# Altium PCB LimeSDR-Mini_2v5_Rounded.PcbDoc (part 7 of 7)
Units mm, origin at the board's own origin, x right, y up, seen from the top; angles counter-clockwise.
Board outline 69 x 31.37 mm, 8 copper layers (Top, L2, L3, L4, L5, L6, L7, Bottom), stack 1.555 mm thick; 439 components, 294 nets, 1986 pads, 831 vias.
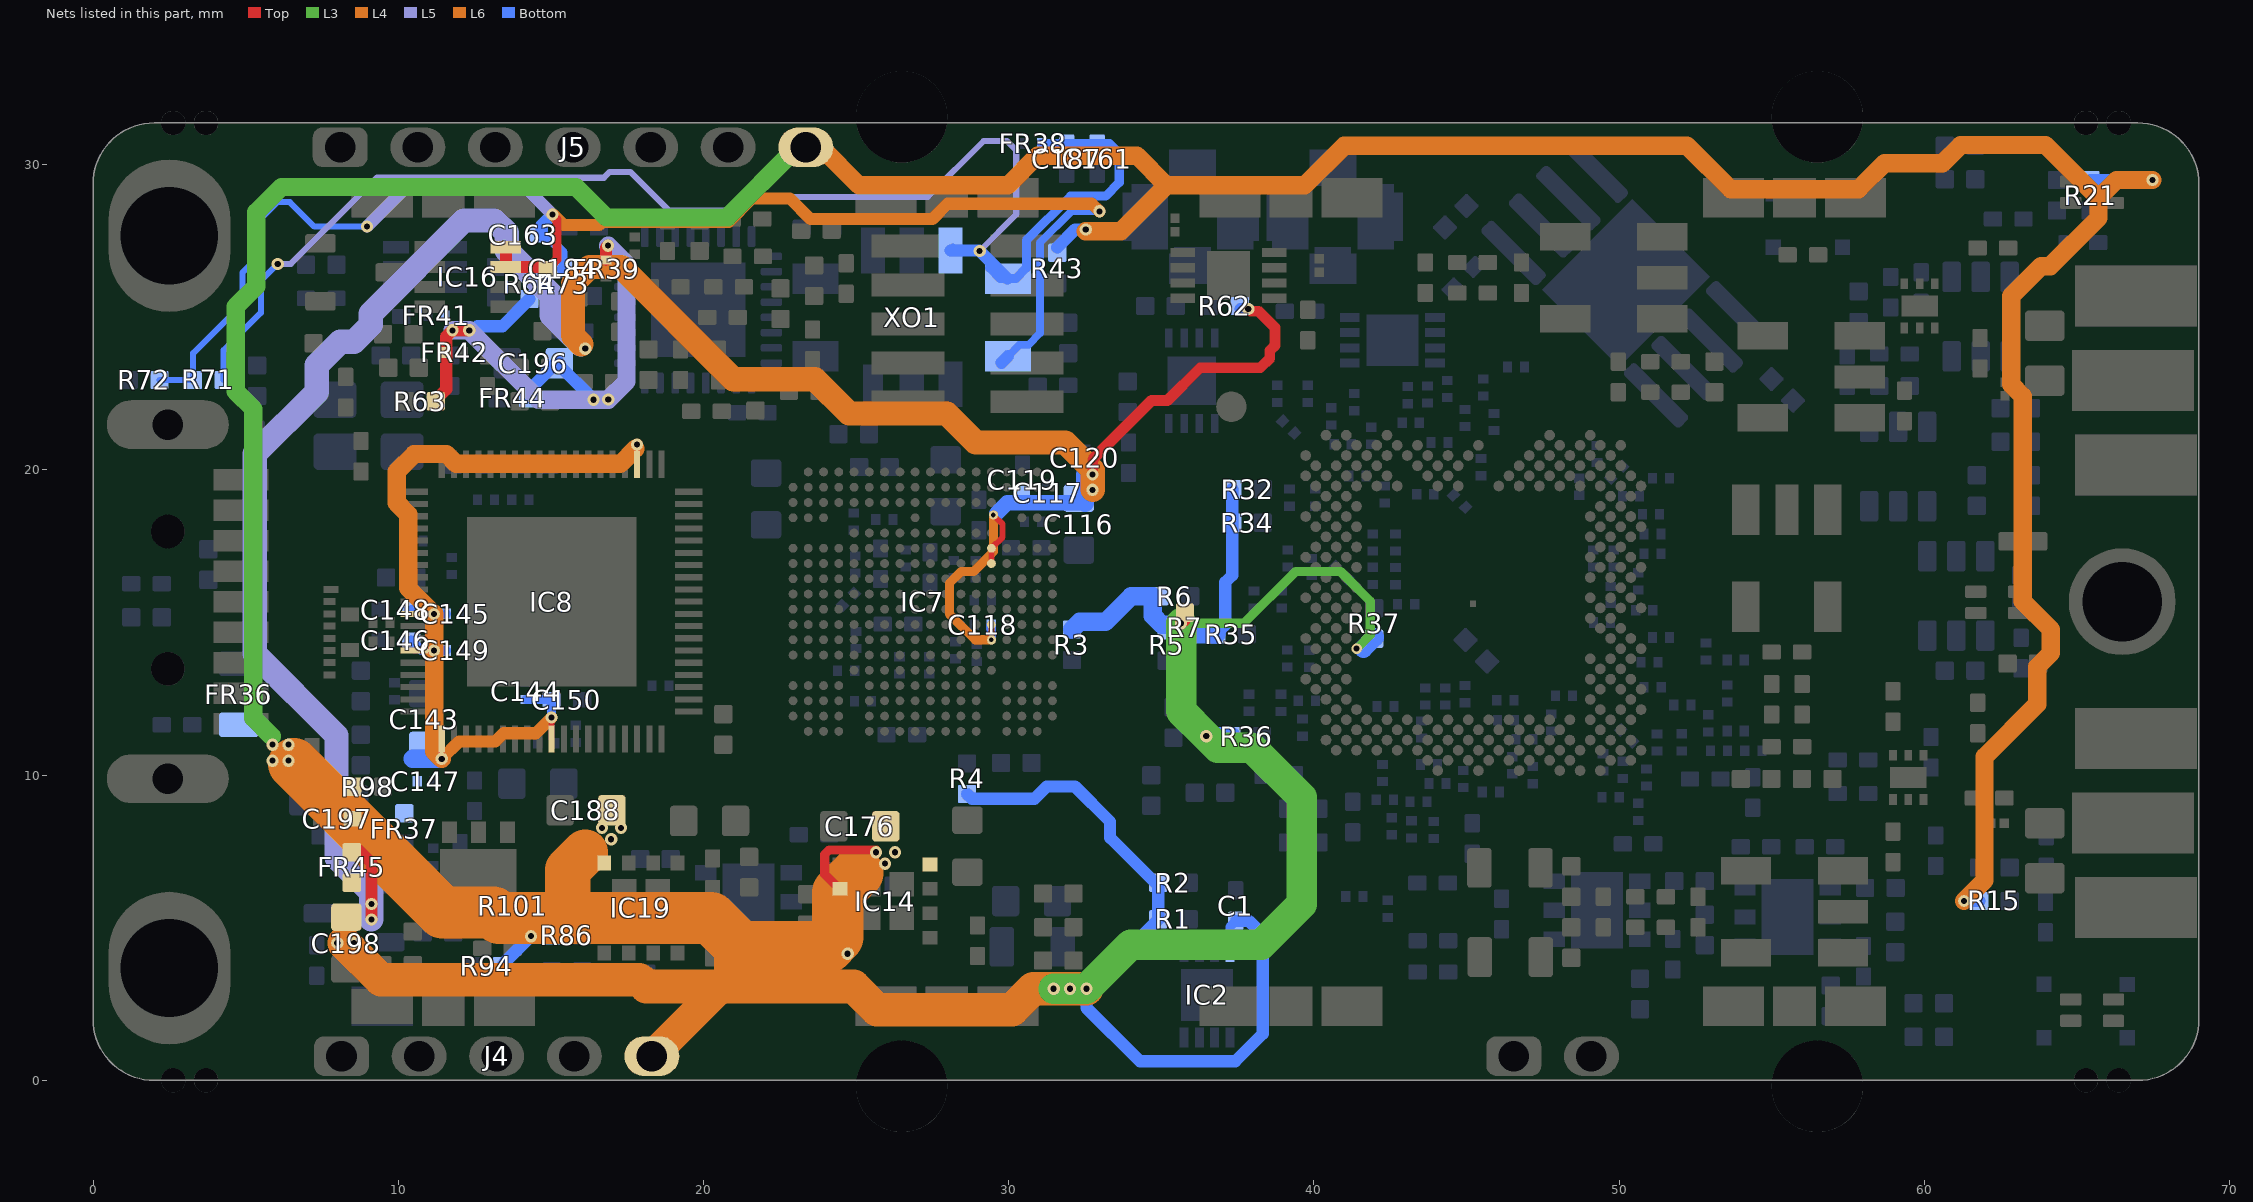
[diagram p12: the nets of this part, all layers, seen from the top]

## Via types
v1: diameter 0.4, hole 0.2, Top to Bottom, tented both sides, 554 vias
v2: diameter 0.3, hole 0.15, Top to Bottom, tented both sides, 160 vias
v3: diameter 0.35, hole 0.2, Top to Bottom, tented both sides, 88 vias
v4: diameter 0.5, hole 0.2, Top to Bottom, tented bottom, 25 vias
v5: diameter 0.5, hole 0.2, Top to Bottom, tented both sides, 4 vias

## Nets (pads, with @x,y where several pads share a name; then routed paths per layer and width w, separated by ;. In a path a pad name is that pad's centre, name@x,y a point inside that pad or via, vN(x,y) a via of type N, cw(c..) or ccw(c..) an arc to the next point about the centre after c; other vN are vias at no path point) (continued)
VCC3P3_CLK: C196.2 FR39.1 FR41.1 FR42.1 FR44.2 R63.2 R64.2 | length 20.9
  Top w0.4: R63.2@11.225,22.3 11.57,22.645 FR42.1@11.57,23.85 11.57,24.37 v1(11.775,24.575) v1(12.325,24.575) ; FR39.1@16.808,26.877 16.808,27.283 v1(16.875,27.35)
  L5 w0.6: v1(11.775,24.575) v1(12.325,24.575) 14.595,22.305 v1(16.88,22.305) 17.475,22.9 17.475,26.75 v1(16.875,27.35)
  Bottom w0.4: 12.6,24.713 13.412,24.713 R64.2@14.3,25.6 ; FR44.2@14.25,22.4 cw(c14.672,22.4) 14.374,22.699 C196.2@15.225,23.55 ; C196.2@15.2,23.5 16.395,22.305 v1(16.88,22.305)
  other v1: 16.4,22.3
VCC3P3_XO: C161.2 C187.2 FR38.2 R71.2 XO1.8 XO1.9 | length 47.6
  L5 w0.2: v1(6.05,26.75) 6.475,26.75 9.3,29.575 16.734,29.575 16.919,29.76 17.615,29.76 18.875,28.5 21,28.5 21.45,28.95 27.35,28.95 29.175,30.775 29.95,30.775 30.25,30.475 30.25,28.375 v1(29.05,27.175)
  Bottom w0.2: R71.2@4.275,22.95 4.275,23.925 5.5,25.15 5.5,26.2 v1(6.05,26.75)
  Bottom w0.3: XO1.8@28.095,27.19 XO1.8@28.168,27.263 ; XO1.9@29.38,26.62 29.73,26.27 29.955,26.27 XO1.9@29.98,26.27 30.23,26.27 30.58,26.62 30.58,27.526 32.029,28.975 33.175,28.975 33.625,29.425 33.625,30.375 33.3,30.7 C161.2@32.9,30.7 C187.2@31.9,30.7 FR38.2@31.08,30.7
  Bottom w0.4: XO1.8@28.095,27.19 29.035,27.19 v1(29.05,27.175) XO1.9@29.955,26.27
VCC5P0: C176.2 C188.2 FR36.2 IC14.2 IC14.8 IC19.8 J4.5 J5.7 R15.1 R21.1 R43.1 R86.2 R94.1 | length 153.9
  Top w0.3: IC14.2@24.475,6.275 24.446,6.275 23.975,6.746 23.975,7.404 24.121,7.55 v1@25.65,7.55
  L3 w0.6: 5.85,11.275 5.25,11.875 5.25,22 4.675,22.575 4.675,25.35 5.35,26.025 5.35,28.45 6.175,29.275 15.825,29.275 16.825,28.275 20.775,28.275 22.975,30.475 J5.7@23.354,30.475
  L4 w0.6: J5.7@23.354,30.575 23.85,30.575 25.1,29.325 29.975,29.325 30.95,30.3 34.2,30.3 35.175,29.325 ; v1@32.525,27.825 33.675,27.825 35.175,29.325 ; v1(61.3,5.878) 61.975,6.553 61.975,10.6 63.7,12.325 63.7,13.55 64.15,14 64.15,14.775 63.225,15.7 63.225,22.425 62.85,22.8 62.85,25.7 63.825,26.675 64.125,26.675 65.713,28.263 65.713,28.913 ; v1(67.475,29.5) 66.3,29.5 65.713,28.913 ; 35.175,29.325 39.7,29.325 41,30.625 52.225,30.625 53.65,29.2 57.85,29.2 58.7,30.05 60.6,30.05 61.2,30.65 63.975,30.65 65.713,28.913
  L4 w1: J4.5@18.311,0.795 20.85,3.334 20.85,4.025 21.2,4.375
  L4 w1.5: 15.55,5.375 15.55,6.9 16.125,7.475
  L4 w1.7: 6.575,10.375 11.45,5.5 13.125,5.5 13.3,5.325 20.25,5.325 21.2,4.375 24.075,4.375 24.4,4.7 24.4,6.15 25.05,6.8
  Bottom w0.4: R94.1@13.4,3.75 13.5,3.85 13.5,3.875 14.375,4.75 R86.2@15.025,4.75 ; R43.1@31.594,27.291 32.178,27.875 v1(32.525,27.875) ; v1(61.3,5.878) R15.1@61.8,5.878 ; R21.1@65.45,29.5 v1(67.475,29.5)
  other v1: 24.725,4.15 14.35,4.725 25.95,7.1 25.65,7.475 26.275,7.475 16.975,7.9 16.675,8.275 17.3,8.275 5.875,10.475 6.4,10.475 5.875,11 6.4,11
VD10_FT: C143.2 C144.2 C145.1 C146.1 C147.1 C148.1 C149.1 C150.1 FR37.1 IC8.3 IC8.30 IC8.33 IC8.39 IC8.48 | length 30.7
  Top w0.2: IC8.33@10.525,14.085 v1(11.175,14.085) ; IC8.30@10.525,15.285 v1(11.175,15.285) ; v1(11.425,10.535) IC8.39@11.425,11.185 ; IC8.48@15.025,11.185 v1@15.025,11.835 ; IC8.3@17.825,20.185 v1(17.825,20.835)
  L4 w0.6: v1(11.425,10.535) 11.175,10.785 v1(11.175,14.085) v1(11.175,15.285) 10.325,16.135 10.325,18.55 9.95,18.925 9.95,19.95 10.525,20.525 11.575,20.525 11.9,20.2 17.275,20.2 v1@17.775,20.7
  L6 w0.4: v1(11.425,10.535) 11.99,11.1 13.175,11.1 13.45,11.375 14.515,11.375 v1(15.025,11.885)
  Bottom w0.3: C146.1@10.425,14.425 10.765,14.085 v1(11.175,14.085) C149.1@11.585,14.085 ; C148.1@10.425,15.425 11.035,15.425 v1(11.175,15.285) C145.1@11.585,15.285 ; C144.2@14.18,12.475 C150.1@15.025,12.475 v1(15.025,11.885)
  Bottom w0.6: C143.2@10.475,10.535 v1@11.35,10.535
VDIO_LMS: C1.1 C198.2 FR45.2 IC2.8 R1.1 R2.1 R3.2 R4.2 R5.1 R6.1 R7.2 R32.1 R34.1 R35.1 R36.1 R37.1 | length 94.7
  Top w0.4: v1(35.65,14.978) 35.775,15.103 R7.2@35.775,15.325 R7.2@35.775,15.375
  L3 w0.3: v1(35.65,14.978) 37.709,14.978 39.406,16.675 40.875,16.675 41.85,15.7 41.85,14.595 v3(41.401,14.146)
  L3 w1: v1(31.475,3) v1(32.013,3) v1(32.55,3) 34,4.45 38.275,4.45 39.6,5.775 39.6,9.275 37.972,10.903 36.85,10.903 v1(36.475,11.278) 35.65,12.103 v1(35.65,14.978)
  L6 w1.1: 8.225,4.5 9.425,3.3 17.9,3.3 18.125,3.075 24.925,3.075 25.685,2.315 30.115,2.315 30.8,3 v1(31.475,3) v1(32.013,3) v1(32.55,3)
  Bottom w0.3: IC2.8@37.25,4.2 37.25,5.025 C1.1@37.45,5.225
  Bottom w0.4: R4.2@28.635,9.385 28.795,9.225 30.85,9.225 31.25,9.625 32.175,9.625 33.325,8.475 33.325,7.95 34.9,6.375 R1.1@34.9,5.275 32.625,3 v1(32.55,3) 32.55,2.375 34.3,0.625 37.425,0.625 38.325,1.525 38.325,4.775 37.875,5.225 C1.1@37.45,5.225 ; R35.1@36.801,14.621 37.097,14.917 37.097,16.322 37.326,16.551 R32.1@37.326,19.371
  Bottom w0.6: v1(31.475,3) v1(32.013,3) v1(32.55,3) ; R3.2@32.075,14.775 32.325,15.025 33.175,15.025 34.01,15.86 34.721,15.86 34.721,15.229 35.025,14.925 35.65,14.925 35.703,14.925 36.006,14.621 R35.1@36.801,14.621 ; v1(36.475,11.278) R36.1@37.3,11.278 ; 41.627,14.147 R37.1@42.001,14.521
  other v1: 8,4.5 8.55,4.5
VDIO_LMS_FPGA: C116.2 C117.2 C118.1 C119.2 C120.1 C197.2 FR45.1 IC7.G5 IC7.H5 IC7.M5 IC7.N5 R62.2 R98.2 R101.2 | length 81.7
  Top w0.2: v2(29.435,14.435) IC7.H5@29.435,14.935 ; IC7.M5@29.435,16.935 IC7.N5@29.435,17.435 29.8,17.8 29.8,18.225 v2(29.5,18.525)
  Top w0.35: v1(32.75,19.85) 32.75,20.345 34.68,22.275 35.205,22.275 36.28,23.35 38.247,23.35 38.55,23.653 38.55,23.903 38.725,24.078 38.725,24.661 38.186,25.2 37.939,25.2 37.864,25.275 v1(37.85,25.275)
  Top w0.4: FR45.1@8.725,7.525 9.118,7.132 v1(9.118,5.782) v1(9.118,5.275)
  L4 w0.3: v2(29.435,14.435) 28.903,14.435 28.059,15.279 28.059,16.284 28.45,16.675 28.85,16.675 29.5,17.325 v2(29.5,18.525)
  L4 w0.8: v1@16,24.125 15.725,24.4 15.725,26.1 16.275,26.65 17.3,26.65 20.975,22.975 23.65,22.975 24.775,21.85 27.975,21.85 28.925,20.9 31.85,20.9 32.75,20 v1(32.75,19.35)
  L5 w0.8: v1(9.118,5.275) v1(9.118,5.782) 9.118,6.157 7.975,7.3 7.975,11.3 5.3,13.975 5.3,20.525 7.325,22.55 7.325,23.425 8.1,24.2 8.55,24.2 9.1,24.75 9.1,25.125 12.15,28.175 13.15,28.175 13.55,27.775 13.55,27.2 15.025,25.725 15.025,25.075 15.975,24.125
  Bottom w0.3: C118.1@29.43,14.925 29.43,14.44 v2(29.435,14.435)
  Bottom w0.4: R62.2@37.6,25.275 v1(37.85,25.275)
  Bottom w0.5: v2@29.6,18.575 29.95,18.925 C116.2@32.5,18.925
  Bottom w0.6: C116.2@32.5,18.925 32.5,19.85
  other v1: 16.125,23.975
XO_VC: C163.2 C184.1 IC16.3 IC16.4 R71.1 R72.1 R73.1 XO1.10 | length 50.7
  Top w0.3: C184.1@14.9,26.6 14.95,26.6 15.05,26.7 15.05,26.75 15.2,26.9 15.2,28.198 15.05,28.348 v1(15.05,28.375)
  Top w0.4: IC16.4@13.525,27.3 IC16.3@13.525,26.65 14.85,26.65 C184.1@14.9,26.6
  L4 w0.4: v1(15.05,28.375) 15.068,28.375 15.418,28.025 16.575,28.025 16.675,28.125 20.825,28.125 21.6,28.9 22.825,28.9 23.5,28.225 27.5,28.225 28,28.725 32.725,28.725 v1(32.975,28.475)
  L5 w0.4: v1(8.975,27.975) 10.175,29.175 14.25,29.175 v1(15.05,28.375)
  Bottom w0.2: R72.1@2.175,22.95 R71.1@3.275,22.95 3.275,23.825 4.9,25.45 4.9,26.475 5.35,26.925 5.35,28.091 6.034,28.775 6.45,28.775 7.25,27.975 v1(8.975,27.975)
  Bottom w0.25: XO1.10@29.98,23.73 30.355,24.105 30.655,24.105 31.025,24.475 31.025,27.441 32.059,28.475 v1(32.975,28.475)
  Bottom w0.3: C163.2@14.65,27.7 14.75,27.6 14.936,27.6 15.4,27.136 R73.1@15.4,26.6
  Bottom w0.4: C163.2@14.65,27.7 14.7,27.75 14.7,28.025 v1(15.05,28.375) ; R73.1@15.4,26.575 R73.1@15.4,26.6 ; XO1.10@29.763,23.512 XO1.10@29.98,23.73
pads on no net: C1.0 C2.0 C3.0 C4.0 C5.0 C6.0 C7.0 C8.0 C9.0 C10.0 C11.0 C12.0 C13.0 C14.0 C15.0 C16.0 C17.0 C18.0 C19.0 C20.0 C21.0 C22.0 C23.0 C24.0 C25.0 C26.0 C27.0 C28.0 C29.0 C68.0 C69.0 C70.0 C71.0 C82.0 C83.0 C84.0 C97.0 C99.0 C102.0 C104.0 C109.0 C113.0 C115.0 C116.0 C119.0 C121.0 C124.0 C129.0 C130.0 C131.0 C132.0 C133.0 C134.0 C143.0 C146.0 C148.0 C150.0 C151.0 C153.0 C154.0 C155.0 C156.0 C157.0 C158.0 C159.0 C160.0 C161.0 C162.0 C163.0 C164.0 C165.0 C166.0 C167.0 C168.0 C169.0 C170.0 C171.0 C172.0 C173.0 C174.0 C175.0 C176.0 C177.0 C178.0 C179.0 C180.0 C181.0 C182.0 C183.0 C184.0 C185.0 C186.0 C187.0 C188.0 C189.0 C190.0 C191.0 C192.0 C193.0 C194.0 C195.0 C196.0 C197.0 C198.0 C199.0 C200.0 C201.0 ESD3.9 ESD3.10 FL1.1 FR22.0 FR23.0 FR25.0 FR35.0 FR36.0 FR37.0 FR44.0 FR45.0 IC1.A5 IC1.A13 IC1.A21 IC1.AA1 IC1.AA3 IC1.AA5 IC1.AB2 IC1.AB4 IC1.AB6 IC1.AC3 IC1.AC5 IC1.AD2 IC1.AE1 IC1.AE5 IC1.AG3 IC1.AG33 IC1.AH2 IC1.AH4 IC1.AH32 IC1.AJ1 IC1.AJ3 IC1.AJ5 IC1.AJ11 IC1.AJ13 IC1.AJ21 IC1.AJ27 IC1.AJ29 IC1.AJ31 IC1.AJ33 IC1.AK2 IC1.AK4 IC1.AK6 IC1.AK8 IC1.AK10 IC1.AK26 IC1.AK28 IC1.AK30 IC1.AK32 IC1.AK34 IC1.AL3 IC1.AL5 IC1.AL7 IC1.AL9 IC1.AL11 IC1.AL27 IC1.AL29 IC1.AL31 IC1.AL33 IC1.AM6 IC1.AM10 IC1.AM12 IC1.AM28 IC1.AM30 IC1.AM34 IC1.AN11 IC1.AN27 IC1.AN29 IC1.AN31 IC1.AP30 IC1.AP32 IC1.B2 IC1.B4 IC1.B12 IC1.B14 IC1.B22 IC1.C1 IC1.C3 IC1.C5 IC1.C9 IC1.C11 IC1.C13 IC1.C15 IC1.C17 IC1.C19 IC1.C31 IC1.D2 IC1.D4 IC1.D8 IC1.D10 IC1.D12 IC1.D14 IC1.D18 IC1.D22 IC1.D30 IC1.D32 IC1.E3 IC1.E9 IC1.E11 IC1.E13 IC1.E15 IC1.E23 IC1.E29 IC1.E31 IC1.F2 IC1.F4 IC1.F10 IC1.F12 IC1.F14 IC1.F16 IC1.F22 IC1.F26 IC1.F32 IC1.G1 IC1.G29 IC1.J1 IC1.M2 IC1.M6 IC1.P2 IC1.R3 IC1.R5 IC1.T4 IC1.T6 IC1.U1 IC1.U3 IC1.U5 IC1.V2 IC1.V4 IC1.V6 IC1.W3 IC1.Y2 IC1.Y4 IC1.Y6 IC7.J3 IC7.U15 IC7.V2 IC7.V3 IC7.V11 IC7.V12 IC8.17 IC8.18 IC8.19 IC9.5 IC9.7 IC9.8 IC9.11 IC9.12 IC9.20 IC9.22 IC9.24 IC10.9 IC14.1 IC14.7 IC17.0 IC19.1 IC19.7 IC20.1 IC20.2 IC20.3 IC20.7 IC20.PAD J6.11 LED1.0 LED2.0 LED3.0 MN1.0 MN2.0 MN3.0 MN4.0 MN5.0 MN6.0 MN7.0 MN8.0 MN9.0 MN10.0 MN11.0 MN12.0 MN13.0 MN14.0 MN15.0 MN16.0 MN17.0 MN18.0 MN19.0 MN20.0 MN21.0 MN22.0 MN23.0 MN24.0 R1.0 R2.0 R3.0 R4.0 R5.0 R6.0 R7.0 R8.0 R9.0 R10.0 R11.0 R12.0 R13.0 R14.0 R15.0 R16.0 R17.0 R18.0 R19.0 R20.0 R21.0 R22.0 R23.0 R24.0 R25.0 R26.0 R27.0 R31.0 R32.0 R33.0 R34.0 R35.0 R36.0 R37.0 R38.0 R39.0 R42.0 R43.0 R44.0 R45.0 R46.0 R47.0 R48.0 R49.0 R50.0 R51.0 R52.0 R53.0 R54.0 R55.0 R56.0 R57.0 R58.0 R59.0 R60.0 R61.0 R62.0 R63.0 R64.0 R65.0 R66.0 R67.0 R68.0 R69.0 R70.0 R71.0 R72.0 R73.0 R74.0 R75.0 R76.0 R77.0 R78.0 R79.0 R80.0 R81.0 R82.0 R83.0 R84.0 R85.0 R86.0 R87.0 R88.0 R89.0 R90.0 R91.0 R92.0 R93.0 R94.0 R95.0 R96.0 R97.0 R98.0 R99.0 R100.0 R101.0 R102.0 R103.0 SB1.0 SB2.0 SB3.0 SB4.0 T1.2 T2.2 T3.2 T4.2 VT1.0 VT2.0 VT3.0 VT4.0 XO1.1 XO1.2 XO1.3 XO1.7 XT1.0
copper on no net:
  other v2: 30.31,15.56

## Polygon pours and split planes (outlines as drawn)
GND on L2 "GND_L02_P005" (solid, remove dead copper, pour order 5): 0,2 0,29.37 cw(c2,29.37) 2,31.37 67,31.37 cw(c67,29.37) 69,29.37 69,2 cw(c67,2) 67,0 2,0 cw(c2,2)
GND on L7 "GND_L07_P022" (solid, remove dead copper, pour order 22): 0,2 0,29.37 cw(c2,29.37) 2,31.37 67,31.37 cw(c67,29.37) 69,29.37 69,2 cw(c67,2) 67,0 2,0 cw(c2,2)
GND on L5 "GND_L05_P020" (solid, remove dead copper, pour order 20): 0,2 0,29.37 cw(c2,29.37) 2,31.37 67,31.37 cw(c67,29.37) 69,29.37 69,2 cw(c67,2) 67,0 2,0 cw(c2,2)
GND on L6 "GND_L06_P021" (solid, remove dead copper, pour order 21): 0,2 0,29.37 cw(c2,29.37) 2,31.37 67,31.37 cw(c67,29.37) 69,29.37 69,2 cw(c67,2) 67,0 2,0 cw(c2,2)
GND on Top "GND_L01_P004" (solid, remove dead copper, pour order 4): 0,2 0,29.37 cw(c2,29.37) 2,31.37 67,31.37 cw(c67,29.37) 69,29.37 69,2 cw(c67,2) 67,0 2,0 cw(c2,2)
GND on L4 "GND_L04_P019" (solid, remove dead copper, pour order 19): 0,2 0,29.37 cw(c2,29.37) 2,31.37 67,31.37 cw(c67,29.37) 69,29.37 69,2 cw(c67,2) 67,0 2,0 cw(c2,2)
GND on L3 "GND_L03_P018" (solid, remove dead copper, pour order 18): 0,2 0,29.37 cw(c2,29.37) 2,31.37 67,31.37 cw(c67,29.37) 69,29.37 69,2 cw(c67,2) 67,0 2,0 cw(c2,2)
GND on Bottom "GND_L08_P023" (solid, remove dead copper, pour order 23): 0,2 0,29.37 cw(c2,29.37) 2,31.37 67,31.37 cw(c67,29.37) 69,29.37 69,2 cw(c67,2) 67,0 2,0 cw(c2,2)

## Other copper
Top:
  region net VCC1P8: 27.225,5.15 27.725,5.15 27.8,5.225 27.8,7 28.275,7.475 29.05,7.475 29.15,7.375 29.15,6.2 29.075,6.125 29.075,4.875 28.575,4.375 27.25,4.375 27.1,4.525 27.1,5.025
  region net VCC5P0: 25.325,8.65 25.325,7.425 25.825,6.925 26.95,6.925 27.075,6.8 27.625,6.8 27.675,6.85 27.675,8.175 27.025,8.825 25.5,8.825
  region net VCC5P0: 16.5,6.85 16.05,7.3 16.05,8.975 16.425,9.35 17.425,9.35 17.575,9.2 17.575,7.825 17.175,7.425 17.175,7.025 17,6.85
  region net VCC3P3: 19.275,6.875 19.8,7.4 19.8,8.925 19.7,9.025 18.275,9.025 18,8.75 18,8.05 18.375,7.675 18.675,7.675 18.8,7.55 18.8,7 18.925,6.875
  region net GND: 64.7,6.675 64.7,3.675 68.025,3.675 68.95,4.6 68.95,6.675
  region net VDIO_LMS_FPGA: 8.8,9.975 8.25,9.975 8,9.725 8,8.225 8.175,8.05 8.175,7.475 8.475,7.175 8.825,7.175 9.1,7.45 9.1,8.125 8.925,8.3 8.925,9.85
  region net VCC2P5: 10.5,6.925 10.5,9.325 9.85,9.975 9.2,9.975 9.2,9.275 9.2,8.5 9.6,8.1 9.6,6.925
  region net VCC3P3: 13.325,8.5 14.375,8.5 14.675,8.2 14.675,7.617 14.375,7.317 13.967,7.725 13.35,7.725 13.325,7.75
  region net VCC2P5: 9.6,7.275 9.6,6.1 10.325,5.375 10.75,5.375 11.175,4.95 11.925,4.95 12,5.025 12,5.6 11.9,5.7 11.375,5.7 10.5,6.575 10.5,7.275
  region net GND: 3.4,19.05 5.75,19.05 5.75,18.325 3.4,18.325
  region net NetJ6_7: 4.85,15.345 4.025,15.345 3.875,15.195 3.625,15.195 3.525,15.295 3.525,15.685 4.85,15.685
  region net NetJ6_7: 4.85,16.025 4.025,16.025 3.875,16.175 3.625,16.175 3.525,16.075 3.525,15.685 4.85,15.685
  region net USB_VBUS: 3,12.375 3,12.995 4.28,12.995 4.3,12.975 4.3,12.4 4.275,12.375
  region net USB_VBUS: 5.75,13.045 3.975,13.045 3.8,13.22 3.225,13.22 3,12.995 3,12.695 5.75,12.695
  region net USB_VBUS: 5.75,12.325 3.975,12.325 3.8,12.15 3.225,12.15 3,12.375 3,12.675 5.75,12.675
  region net NetC6_2: 63.3,6.325 63.3,5.975 63.475,5.8 64.425,5.8 64.6,5.975 64.6,6.325
  region net GND: 54.825,19.808 55.142,20.125 58.283,20.125 61.491,16.916 61.825,17.25 58.475,20.6 54.525,20.6 54.155,20.23 54.155,19.7 54.825,19.03
  region net GND: 48.675,14.147 49.65,14.147 48.7,15.1 48.675,15.1
  region net GND: 58.725,25.575 56.69,25.575 56.69,23.733 58.725,23.733
  region net GND: 56.14,3.4 55.77,3.03 58.75,3.03 58.75,4.632 58.54,4.842 56.35,4.842 56.14,4.632
  region net GND: 53.005,19.9 53.005,17.5 54.817,17.5 54.817,19.9
  region net GND: 62.275,22.125 62.025,22.125 61.9,22 61.9,21.775 61.975,21.7 62.475,21.7 62.85,22.075 62.85,22.575 62.5,22.575 62.5,22.35
  region net VCC1P8_LMS: 57.31,10.225 57.135,10.4 56.866,10.4 56.693,10.227 56.693,9.877 57.308,9.877
  region net VCC1P8_LMS: 57.31,9.529 57.131,9.35 56.87,9.35 56.693,9.527 56.693,9.877 57.308,9.877
  region net VCC1P8_LMS: 53.675,9.529 53.854,9.35 54.116,9.35 54.293,9.527 54.293,9.877 53.677,9.877
  region net VCC1P8_LMS: 53.675,10.225 53.85,10.4 54.12,10.4 54.293,10.227 54.293,9.877 53.677,9.877
  region net TX1_1_A_P: 48.48,9.907 48.427,9.96 48.427,10.102
  region net VCC1P8_LMS: 45.825,7.625 44.8,7.625 44.625,7.45 44.625,6.5 44.825,6.3 45.825,6.3
  region net VCC1P8_LMS: 45.825,3.408 44.8,3.408 44.625,3.583 44.625,4.533 44.825,4.733 45.825,4.733
  pour cut-out: 5.075,11.225 9.075,11.225 10.325,12.475 10.325,18.7 8.15,18.7 6.58,17.13 5.855,17.13 5.075,16.35
  region net VDIO_LMS: 7.8,5.075 7.8,4.4 7.925,4.275 8.675,4.275 8.8,4.4 8.8,5.075
  region net GND: 49.675,28.825 50.125,28.375 50.125,27.6 50.525,27.2 52.25,27.2 53.425,28.375 53.425,28.825
  region net VCC3P3: 14.575,7.775 14.575,5.65 13.9,4.975 13.325,4.975 13.325,5.675 13.9,5.675 14.125,5.9 14.125,7.775
  region net GND: 13.025,8.475 13.175,8.325 13.175,7.575 13.925,7.575 13.925,5.875 11.375,5.875 11.375,7.575 12.15,7.575 12.15,8.475
  region net VDIO_LMS: 8.8,6.775 8.1,6.775 7.8,6.475 7.8,5.6 8.8,5.6
  region net NetC21_2: 63.3,25.025 63.3,25.25 64.125,26.075 64.4,26.075 64.6,25.875 64.6,25.025
  region net GND: 64.7,10.2 64.7,12.875 68.35,12.875 68.95,12.275 68.95,10.2
  region net GND: 64.7,24.7 64.7,27.7 68.025,27.7 68.95,26.775 68.95,24.7
  region net GND: 64.7,21.175 64.7,18.225 68.321,18.225 68.95,18.854 68.95,21.175
  pour cut-out: 43.775,3.075 42.481,4.369 42.481,8.156 43.5,9.175 44.1,9.175 44.775,9.85 45.48,9.85 46.63,11 48.54,11 49.515,10.025 52.55,10.025 53.55,11.025 53.55,13.3 52.85,14 52.85,16.725 53.3,17.175 54.6,17.175 54.825,17.4 54.825,19.9 54.325,20.4 53,20.4 52.1,21.3 49.216,21.3 49.056,21.14 49.056,19.808 48.348,19.1 45.45,19.1 45.45,20.4 43.325,22.525 41.4,22.525 40.6,23.325 40.6,26.625 41.806,27.831 42.481,27.831 43.325,28.675 58.375,28.675 58.775,28.275 62.862,28.275 64.937,26.2 69,26.2 69,20.6 64.75,20.6 60.9,16.75 60.9,14.525 64.75,10.675 69,10.675 69,8.725 69,5.15 65.05,5.15 62.975,3.075
L2:
  pour cut-out: 49.35,28.325 47.395,28.325 47.395,26.975 49.35,26.975
  pour cut-out: 63.3,7.625 63.3,9.25 64.6,9.25 64.6,7.625
  pour cut-out: 50.3,25.635 52.255,25.635 52.255,24.285 50.3,24.285
  pour cut-out: 49.35,25.635 47.395,25.635 47.395,24.285 49.35,24.285
  pour cut-out: 56.75,22.385 58.705,22.385 58.705,21.035 56.75,21.035
  pour cut-out: 55.85,25.075 53.895,25.075 53.895,23.725 55.85,23.725
  pour cut-out: 55.85,22.385 53.895,22.385 53.895,21.035 55.85,21.035
  pour cut-out: 56.165,16.66 56.165,14.705 57.515,14.705 57.515,16.66
  pour cut-out: 53.475,16.66 53.475,14.705 54.825,14.705 54.825,16.66
  pour cut-out: 57.3,17.6 57.3,19.775 56.15,19.775 56.15,17.6
  pour cut-out: 55.3,4.86 53.345,4.86 53.345,3.51 55.3,3.51
  pour cut-out: 55.3,7.55 53.345,7.55 53.345,6.2 55.3,6.2
  pour cut-out: 53.425,22.24 52.81,22.24 52.81,22.865 53.425,22.865
  pour cut-out: 50.235,22.24 49.71,22.24 49.71,22.865 50.235,22.865
  pour cut-out: 50.235,23.86 49.71,23.86 49.71,23.235 50.235,23.235
  pour cut-out: 52.335,22.81 52.335,22.285 51.71,22.285 51.71,22.81
  pour cut-out: 50.715,22.81 50.715,22.285 51.34,22.285 51.34,22.81
  pour cut-out: 52.335,23.81 52.335,23.285 51.71,23.285 51.71,23.81
  pour cut-out: 50.715,23.81 50.715,23.285 51.34,23.285 51.34,23.81
  pour cut-out: 53.425,23.24 52.81,23.24 52.81,23.865 53.425,23.865
  pour cut-out: 47.05,26.49 46.55,26.49 46.55,27.115 47.05,27.115
  pour cut-out: 44.39,27.06 44.39,26.535 45.015,26.535 45.015,27.06
  pour cut-out: 46.01,27.06 46.01,26.535 45.385,26.535 45.385,27.06
  pour cut-out: 44.39,26.06 44.39,25.535 45.015,25.535 45.015,26.06
  pour cut-out: 46.01,26.06 46.01,25.535 45.385,25.535 45.385,26.06
  pour cut-out: 43.91,27.11 43.385,27.11 43.385,26.485 43.91,26.485
  pour cut-out: 43.91,25.49 43.385,25.49 43.385,26.115 43.91,26.115
  pour cut-out: 47.05,25.49 46.55,25.49 46.55,26.115 47.05,26.115
  pour cut-out: 54.69,9.575 55.315,9.575 55.315,10.2 54.69,10.2
  pour cut-out: 55.69,9.575 56.315,9.575 56.315,10.2 55.69,10.2
  pour cut-out: 56.31,10.675 56.31,11.2 55.685,11.2 55.685,10.675
  pour cut-out: 54.69,10.675 54.69,11.2 55.315,11.2 55.315,10.675
  pour cut-out: 54.69,13.775 54.69,14.3 55.315,14.3 55.315,13.775
  pour cut-out: 56.31,13.775 56.31,14.3 55.685,14.3 55.685,13.775
  pour cut-out: 55.26,11.675 54.735,11.675 54.735,12.3 55.26,12.3
  pour cut-out: 55.26,13.295 54.735,13.295 54.735,12.67 55.26,12.67
  pour cut-out: 56.26,11.675 55.735,11.675 55.735,12.3 56.26,12.3
  pour cut-out: 56.26,13.295 55.735,13.295 55.735,12.67 56.26,12.67
  pour cut-out: 64.85,24.7 64.85,21.175 68.85,21.175 68.85,24.7
  pour cut-out: 64.85,10.2 64.85,6.675 68.85,6.675 68.85,10.2
  pour cut-out: 56.2,7.55 58.155,7.55 58.155,6.2 56.2,6.2
  pour cut-out: 51.845,4.755 51.845,5.28 51.22,5.28 51.22,4.755
  pour cut-out: 50.225,4.755 50.225,5.28 50.85,5.28 50.85,4.755
  pour cut-out: 51.845,5.755 51.845,6.28 51.22,6.28 51.22,5.755
  pour cut-out: 50.225,5.755 50.225,6.28 50.85,6.28 50.85,5.755
  pour cut-out: 52.325,4.705 52.85,4.705 52.85,5.33 52.325,5.33
  pour cut-out: 52.325,6.325 52.85,6.325 52.85,5.7 52.325,5.7
  pour cut-out: 49.225,6.325 49.75,6.325 49.75,5.7 49.225,5.7
  pour cut-out: 49.225,4.705 49.75,4.705 49.75,5.33 49.225,5.33
  pour cut-out: 48.125,5.325 48.125,4.7 48.75,4.7 48.75,5.325
  pour cut-out: 48.125,6.325 48.125,5.7 48.75,5.7 48.75,6.325
  pour cut-out: 63.3,22.125 63.3,23.75 64.6,23.75 64.6,22.125
L3:
  region net VCC1P1: 26.425,8.95 26.575,9.1 26.575,9.775 26.4,9.95 25.85,9.95 25.625,9.725 25.625,9.45 26.125,8.95
  pour cut-out: 64.85,24.625 64.85,21.25 68.85,21.25 68.85,24.625
  pour cut-out: 64.85,10.125 64.85,6.75 68.85,6.75 68.85,10.125
  region net VCC5P0: 5.65,10.375 5.75,10.275 6.55,10.275 6.65,10.375 6.65,11.05 6.225,11.475 6.05,11.475 5.65,11.075
L4:
  region net VCC5P0: 5.65,11.1 5.925,11.375 6.775,11.375 7.075,11.075 7.075,10.55 6.325,9.8 5.95,9.8 5.65,10.1
  pour cut-out: 64.85,24.625 64.85,21.25 68.85,21.25 68.85,24.625
  pour cut-out: 64.85,10.125 64.85,6.75 68.85,6.75 68.85,10.125
  region net VCC5P0: 16.075,8.475 17.425,8.475 17.6,8.3 17.6,7.15 17.3,6.85 15.4,6.85 15.4,7.8
  region net VCC5P0: 24.45,7.4 24.8,7.75 26.3,7.75 26.525,7.525 26.525,6.45 26.3,6.225 25.675,6.225 25.4,5.95 24.45,6.9
  region net VCC1P4_LMS: 42.414,6.786 42.125,7.075 42.125,7.3 41.975,7.45 41.8,7.45 41.275,6.925 41.275,6.75 41.425,6.6 41.55,6.6 41.9,6.25 41.9,6.225
  region net VCC1P25_LMS: 50.775,7.575 50.775,7.5 50.875,7.4 50.875,7.075 50.8,7 50.025,7 49.925,7.1 49.925,7.35 50.075,7.5 50.075,7.575
L5:
  region net AVDD_FT: 10.975,9.15 10.85,9.025 10.85,8.125 10.975,8 11.275,8 11.4,8.125 11.4,9.125 11.375,9.15
  text "A" at 0.5,7.55 h0.7
  text "V" at 1.5,7.55 h0.7
  text "D" at 2.6,7.55 h0.7
  text "R" at 3.15,7.55 h0.7
  text "L" at 0.975,6.975 h0.7
L7:
  pour cut-out: 59.469,18.297 59.469,21.911 57.869,21.911 57.869,18.297
  pour cut-out: 61.375,14.061 61.375,17.675 59.775,17.675 59.775,14.061
  pour cut-out: 61.525,26.839 61.525,23.225 63.125,23.225 63.125,26.839
  pour cut-out: 26.35,23.625 26.35,22.362 26.437,22.275 27.35,22.275 27.35,23.625
L6:
  pour cut-out: 59.469,18.297 59.469,21.911 57.869,21.911 57.869,18.297
  pour cut-out: 61.375,14.061 61.375,17.675 59.775,17.675 59.775,14.061
  pour cut-out: 61.525,26.839 61.525,23.225 63.125,23.225 63.125,26.839
Bottom:
  region net VDIO_LMS_FPGA: 32.3,18.625 32.7,18.625 33,18.925 33,20 32.725,20.275 32.275,20.275 31.8,19.8 31.8,19.125
  region net VCC1P1: 22.5,6.55 22.7,6.35 24.475,6.35 24.725,6.6 24.725,6.775 25.1,7.15 25.1,7.625 26.575,9.1 26.575,9.725 26.25,10.05 25.6,10.05 23.725,8.175 23.725,7.775 23.475,7.525 22.875,7.525 22.5,7.15
  region net VDIO_LMS_FPGA: 13.55,6.075 10.4,6.075 10.3,5.975 9.025,5.975 8.9,5.85 8.9,5.225 9.05,5.075 10.2,5.075 10.475,5.35 13.525,5.35 13.55,5.375
  region net USB_VBUS: 3.825,12.15 3.75,12.075 3.75,11.5 3.55,11.3 2.95,11.3 2.95,12.625 3,12.675
  region net NetC27_2: 61.544,23.214 63.119,23.214 63.119,26.839 61.544,26.839
  region net NetC12_2: 61.356,14.064 59.781,14.064 59.781,17.689 61.356,17.689
  region net NetR16_2: 59.45,18.3 57.875,18.3 57.875,21.925 59.45,21.925
  region: 57.9,21.925
  region net VD10_FT: 10.575,8.45 10.575,8.75 10.775,8.95 10.775,11.335 10.675,11.435 9.86,11.435 9.55,11.125 9.55,8.775 9.9,8.425 10.55,8.425
  region net USB_VBUS: 5.75,13.675 5.375,14.05 3.975,14.05 3.45,14.05 3.125,13.725 3.125,13.2 3,13.075 3,12.275 3.125,12.15 3.825,12.15 4.15,12.475 5.625,12.475 5.75,12.35
  pour cut-out: 4.55,14.225 4.55,19.175 5,19.625 8.3,19.625 8.75,19.175 8.75,14.25 8.25,13.75 5.025,13.75
  region net NetJ6_7: 4.125,16.9 4.2,16.825 4.2,15.3 4.125,15.225 3.425,15.225 3.35,15.3 3.35,16.825 3.425,16.9
  region net VCC5P0: 4.025,12.05 4.025,10.925 4.75,10.2 6.45,10.2 6.625,10.375 6.625,11.125 5.7,12.05
  region net NetC6_2: 62.5,7.325 64.225,7.325 64.425,7.125 64.425,5.725 64.228,5.528 62.5,5.528
  region net VCC3P3: 15.225,10.325 14.975,10.575 14.975,11.225 15.85,11.225 15.85,10.575 15.6,10.325
  region net GND: 12.142,18.422 17.714,18.425 17.714,13.039 17.671,12.996 12.153,12.996
  region net VCC1P8: 27.65,7.15 27.65,4.95 28.975,3.625 30.175,3.625 30.175,5.125 29.45,5.125 29.05,5.525 29.05,7.35 28.95,7.45 27.95,7.45
  region net VCC1P25_LMS: 42.5,5.979 42.421,5.9 42.2,5.9 42.075,6.025 42.5,6.45
  region net GND: 55,6.525 55,8.052 55.113,8.165 56.086,8.165 56.086,6.614 56.175,6.525
  region net GND: 56.375,3.425 55.35,3.425 54.675,4.1 54.675,4.225 56.375,4.225
  region net GND: 53.521,4.846 54.825,4.846 54.825,5.854 53.521,5.854
  region net GND: 44.95,8.45 44.95,9.52 44.875,9.595 45.5,9.595 45.52,9.575 45.425,9.48 45.425,8.55
  region net GND: 43.45,9.65 43.45,9.25 43.7,9 44.025,9 44.025,9.93 43.88,10.075
  region net GND: 35.025,3.175 37.825,3.175 37.825,2.425 35.025,2.425
  region net GND: 42.125,25.4 42.125,23.25 42.975,23.25 42.975,25.4
  region net GND: 36.625,24.65 37.25,24.65 37.45,24.45 37.45,21.3 37.35,21.2 35.6,21.2 35.6,21.85 36.95,21.85 36.95,23.95 36.625,23.95
  region net NetC21_2: 64.725,26.95 64.6,26.95 63.375,28.175 63.375,28.375 63.8,28.8 65.8,28.8 65.8,28.275 65.2,27.675 65.2,27.425
  region net VCC1P8_LMS: 57.49,10.75 56.975,10.75 56.775,10.55 56.775,9.25 56.975,9.05 57.49,9.05
  region net VCC1P8_LMS: 44.042,3.392 44.133,3.3 44.892,3.3 45.1,3.508 45.1,4.067 44.042,4.067
  region net GND: 64.598,24.625 64.598,26.348 65.216,26.966 68.95,26.966 68.95,24.625
  region net GND: 64.598,24.77 64.598,24.453 68.95,24.453 68.95,24.77
  region net GND: 64.598,20.33 64.598,18.375 68.95,18.375 68.95,20.33
  region net GND: 64.598,20.33 64.598,21.15 68.796,21.15 68.796,20.33
  region net GND: 65.025,11.74 65.025,12.575 68.796,12.575 68.796,11.74
  region net GND: 43.225,16.51 43.71,16.025 43.71,15.075 42.8,15.075 42.8,13.325 44.95,13.325 44.95,13.392 43.975,14.367 43.975,14.6 44.825,15.45 45.1,15.45 46.775,13.775 48.278,13.775 48.278,14.328 48.675,14.725 48.675,17.428 48.187,17.916 48.187,20.338 46.85,21.675 46.35,21.675 46.35,20.525 45.975,20.15 45.975,18.625 45.475,18.125 44.75,18.125 44.175,18.7 43.225,18.7
  region net VCC3P3_CLK: 11.375,25.425 11.4,25.45 12.075,25.45 12.6,24.925 12.6,24.5 12.475,24.375 11.675,24.375 11.375,24.675
  region net VCC3P3: 13.625,19.745 13.875,19.495 13.875,18.845 13,18.845 13,19.495 13.25,19.745
  region net NetC89_1: 38.988,21.345 39.501,21.857 39.501,22.157 39.501,22.282 39.401,22.382 38.276,22.382 38.251,22.357 38.251,22.082
  region net GND: 40.398,18.487 40.398,17.654 40.201,17.457 39.276,17.457 39.251,17.482 39.251,18.682 39.351,18.782 40.102,18.782
  region net VDIO_LMS: 41.226,14.232 41.776,14.782 42.026,14.782 42.026,14.257 41.626,13.857 41.426,13.857 41.226,14.057
  region net GND: 44.851,19.832 45.001,19.982 45.601,19.982 45.601,19.657 45.426,19.482 44.976,19.482
  region net NetC175_1: 9.5,26.2 9.5,25.025 9.75,24.775 11.075,24.775 11.175,24.875 11.175,25.5 10.475,26.2
  region net USB_VBUS: 8.25,11.95 8.25,11 8.425,10.825 8.925,10.825 9.275,10.475 9.275,9.975 9.125,9.825 7.45,9.825 6.825,10.45 6.825,11.95
  region net VCC1P8_LMS: 44.042,4.742 44.125,4.825 44.9,4.825 45.1,4.625 45.1,4.067 44.042,4.067
  region net VCC1P8_LMS: 53.025,9.525 53.208,9.342 54.108,9.342 54.407,9.64 54.407,9.875 53.025,9.875
  region net VCC1P8_LMS: 53.025,10.225 53.208,10.408 54.108,10.408 54.283,10.233 54.283,9.875 53.025,9.875
  region net NetC89_1: 38.251,22.082 38.251,21.874 38.78,21.345 38.988,21.345
  region net USB_VBUS: 5.75,12.35 5.95,12.35 7.05,11.25 7.75,11.25 8.25,11.75 8.25,13 7.575,13.675 5.75,13.675
  region net VCC1P8_LMS: 31.375,3.625 32.175,3.625 32.5,3.95 32.5,7.85 32.05,8.3 31.375,8.3 30.925,7.85 30.925,4.075
  region net GND: 10.017,3.825 8.9,3.825 8.9,4.522 8.84,4.582 9.083,4.825 10.385,4.825 10.385,4.193
  region net AVDD_FT: 9.95,7.45 12.225,7.45 12.275,7.5 12.275,8.206 11.459,8.9 11.025,8.9 10.95,8.825 10.95,8.425 10.8,8.275 9.575,8.275 9.575,7.825
  region net VCC1P8_LMS: 44.042,6.967 44.8,7.725 45.1,7.725 45.1,6.967
  region net VCC1P8_LMS: 44.042,6.292 44.133,6.2 44.675,6.2 45.1,6.625 45.1,6.967 44.042,6.967
  region net GND: 11.8,10.362 11.562,10.125 11.175,10.125 11.175,9.425 11.275,9.325 12.85,9.325 12.875,9.35 12.875,10 12.85,10 12.7,10.15 12.177,10.15 12.009,10.319
  region net GND: 64.598,21.105 64.598,21.34 64.68,21.421 68.95,21.421 68.95,21.105
  region net GND: 64.691,12.461 64.691,9.953 68.95,9.953 68.95,12.461
  region net GND: 64.691,6.605 64.691,4.413 68.95,4.413 68.95,6.605
  region net GND: 64.598,6.605 64.598,6.921 68.95,6.921 68.95,6.605
  region net GND: 37.825,3.175 38,3 38,1.975 37.75,1.725 37.625,1.85 37.625,3.175
  region net NetC30_1: 37.95,12.9 38.125,12.725 38.559,12.725 38.887,13.053 38.625,13.315 38.625,13.575
  region net GND: 48.775,6.025 47.275,6.025 46.875,5.625 46.875,5.1 48.775,5.1
  region net GND: 50.125,4.325 50.125,3.85 49.775,3.5 49.175,3.5 48.425,4.25 48.425,4.325
  region net VCC1P8_LMS: 50.336,2.63 50.1,2.394 50.1,1.85 50.1,1.725 50.35,1.475 51.675,1.475 51.675,2.125 51.05,2.125 50.975,2.2 50.975,2.349 50.694,2.631
  region net NetC54_1: 44.676,20.607 44.676,21.132 44.776,21.232 45.051,21.232 45.076,21.207 45.076,20.907 44.851,20.682 44.733,20.564
  region net NetC54_1: 45.076,21.207 45.076,21.549 45.025,21.6 44.675,21.6 44.675,21.133 44.676,21.132
  region net NetC55_1: 49.725,19.95 49.525,20.15 49.525,20.4 49.075,20.4 49.075,18.875 49.265,18.685 49.725,19.145
  region net VCC1P25_LMS: 50.475,6.625 50.125,6.975 50.05,6.975 49.625,7.4 49.625,7.425 50.75,7.425 51.55,6.625
  region net NetC36_1: 44.45,19.025 44.55,18.925 44.825,19.2 44.4,19.625 44.4,19.65 43.775,19.025

## Silkscreen, mask and mechanical layers (free items; w line width, h text height)
TopOverlay:
  drawing of 319 lines, arcs and shapes, not listed
  text "TCK" at 33.65,30.05 h0.7
  text "TDO" at 36.225,30.05 h0.7
  text "TMS" at 38.875,30.05 h0.7
  text "TDI" at 41.475,30.05 h0.7
  text "VCC3P3" at 43.9,30.05 h0.7
  text "GND" at 30.975,30.025 h0.7
  text "VCC5P0" at 48.525,30 h0.7
  text "v.PROJECT_VERSION" at 5.825,28.725 h1.3 r90
  text "FPGA JTAG" at 16.85,28.625 h0.7
  text "RX" at 63.7,27.7 h1.7 r90
  text "Mini" at 5.825,26 h1.3 r90
  text "-" at 5.725,25.6 h1.3 r90
  text "Lime" at 4.6,23.1 h1.3 r90
  text "SDR" at 5.825,23.1 h1.3 r90
  text "FPGA GPIO" at 34.1,20.875 h0.7 r90
  text "USB3.0" at 7.6,16.725 h0.7 r90
  text "LFE5U" at 33.5,12.1 h0.7 r90
  text "LMS7002M" at 38.95,11.675 h0.9 r90
  text "BOM VER" at 30.75,6.825 h0.55
  text "2" at 29.8,5.675 h0.55
  text "1" at 29.775,4.55 h0.55
  text "0" at 29.775,3.525 h0.55
  text "VCC" at 48.225,1.325 h0.55
  text "TX" at 63.7,0.325 h1.7 r90
  text "GND" at 4.25,0.275 h0.7
  text "VCC3P3" at 35.775,0.225 h0.7
  text "VCC5P0" at 40.375,0.225 h0.7
  text "EGPIO(0-1)" at 28.575,0.175 h0.7
  text "FAN" at 51,0.175 h0.55
BottomOverlay:
  lines w0.1: 11.175,6.425 11.175,6.75 ; 21.175,17.925 19.875,17.925 19.348,17.398 19.348,15.685 18.475,14.812 18.475,13.9 18.825,13.55 21.45,13.55 ; 32.95,26.125 33.925,25.375 ; 36.75,10.325 37.8,10.325 ; 40.25,6.05 40.675,6.05 ; 42.175,6.475 42.3,6.25 ; 48.575,20.525 48.675,20 ; 50.3,8.725 48.75,8.725 ; 52.5,14.65 53.15,14.975 ; 53.4,14.375 54.525,14.375 55.398,14.778 ; 55.136,8.155 55.481,8.5 57.85,8.5 ; 48.75,8.725 48.75,8.725 ; 60.525,27.25 60.525,27.25
  lines w0.15: 37.575,29.95 37.75,29.95 ; 37.675,29.475 37.675,30.275 ; 38.875,29.8 39.05,29.8 ; 38.95,30.275 38.95,29.475 ; 41.55,5.475 40.45,5.475 37.625,2.65 37.625,0.375 42.5,0.375 42.5,3.95 42.5,4.825 ; 37.675,30.275 37.463,29.85 37.888,29.85 37.675,30.275 ; 38.95,29.475 38.738,29.9 39.162,29.9 38.95,29.475
  lines w0.3: 0,2 ccw(c2,2) 2,0 67.005,0 ccw(c67.005,2) 69.005,2 ; 0,29.37 cw(c2,29.37) 2,31.37 67.005,31.37 cw(c67.005,29.37) 69.005,29.37 ; 0.005,1.995 0.005,29.375 ; 6.4,24 6.4,2.425 8.123,2.425 ; 14.827,28.925 17.3,28.925 ; 14.856,2.425 24.623,2.425 ; 23.3,28.925 24.623,28.925 ; 31.327,2.425 33.25,2.425 ; 31.327,28.925 33.25,28.925 ; 33.25,20.9 33.25,28.905 ; 33.3,2.425 33.3,12.4 ; 69,1.995 69,29.375
  lines w0.4: 65.875,12.95 68.225,12.95 ; 68.2,18.445 65.85,18.445 ; 65.85,18.445 66.875,18.103 66.875,18.787 65.85,18.445 ; 68.225,12.95 67.2,12.608 67.2,13.292 68.225,12.95
  text "OUT" at 36.65,30.625 h0.55
  text "IN" at 41.075,30.625 h0.55
  text "REF" at 45.175,30.15 h0.65
  text "CLK" at 45.175,28.95 h0.65
  text "RX" at 68.575,21.675 h1.7
  text "TX" at 68.6,7.2 h1.7
TopSolder:
  region: 62.3,8.225 62.475,8.225 62.475,8.625 62.3,8.625
  region: 62.45,22.675 62.45,22.625 62.85,22.625 62.85,22.675
BottomSolder:
  region: 36.525,29.25 36.775,29.25 36.775,29.525 36.525,29.525
  region: 35.2,29.25 35.425,29.25 35.425,29.5 35.2,29.5
  region: 35.2,26.975 35.45,26.975 35.45,27.35 35.2,27.35
  region: 36.575,27.025 36.775,27.025 36.775,27.35 36.575,27.35
  region: 41.15,27.075 41.45,27.075 41.45,27.35 41.15,27.35
  region: 39.85,27.1 40.075,27.1 40.075,27.35 39.85,27.35
  region: 39.85,29.25 40.15,29.25 40.15,29.525 39.85,29.525
  region: 41.175,29.25 41.45,29.25 41.45,29.55 41.175,29.55
Mechanical1:
  circle w0.2: c66.486,15.685 r1.75
  circle w0.2: c66.486,15.685 r1.3
  lines w0.1: 1.725,-5 1.725,-0.025 ; 1.725,31.395 1.725,36.37 ; 4.7,-5 4.7,-0.025 ; 4.7,31.395 4.7,36.37 ; 8.537,12.93 8.343,13.407 ; 8.82,13.213 8.343,13.407 ; 9.757,11.993 8.343,13.407 ; 30.675,1.725 30.875,1.25 ; 30.875,3.25 30.875,1.25 ; 31.075,1.725 30.875,1.25 ; 64.3,-5 64.3,-0.025 ; 64.3,31.395 64.3,36.37 ; 67.275,-5 67.275,-0.025 ; 67.275,31.395 67.275,36.37 ; 0,2 ccw(c2,2) 2,0 67,0 ccw(c67,2) 69,2 69,29.37 ccw(c67,29.37) 67,31.37 2,31.37 ccw(c2,29.37) 0,29.37 0,2
  lines w0.15: 66.486,17.739 66.486,20.329 ; 67.486,19.742 66.486,20.075 ; 67.486,20.408 66.486,20.075 ; 68,19.742 69,20.075 ; 68,20.408 69,20.075 ; 66.486,20.075 67.743,20.075 69,20.075
  lines w0.2: 0.099,6.879 cw(c2.5,3.68) 4.199,0.059 ; 0.099,24.481 ccw(c2.5,27.68) 4.199,31.301 ; 25.023,31.308 ccw(c26.5,31.57) 27.973,31.283 ; 25.027,0.087 cw(c26.5,-0.2) 27.977,0.062 ; 55.027,0.087 cw(c56.5,-0.2) 57.977,0.062 ; 55.027,31.283 ccw(c56.5,31.57) 57.977,31.308 ; 0.9,3.13 ccw(c2.5,3.13) 4.1,3.13 4.1,4.23 ccw(c2.5,4.23) 0.9,4.23 0.9,3.13 ; 0.9,27.13 ccw(c2.5,27.13) 4.1,27.13 4.1,28.23 ccw(c2.5,28.23) 0.9,28.23 0.9,27.13
  text "NOTE: mounting cutout hole radius with the center offset to the outside of the PCB by 0.2mm" at 31,26.6 h0.7
  text "0,25cm" at 64.7,20.875 h0.7
  text "Component-free area for mounting screws on both PCB sides" at 5.775,20.375 h0.55
  text "Local Fiducial" at 34.4,18.45 h0.7
  text "NOTE: mounting/30mm FAN slots / 2x 3.2mm x 4.3mm  / 24mm distance between centers to fit 30mm FAN." at 0.6,14.225 h0.7
  text "Mounting hole for M2.5 screw (4.5mm cap)" at 60.575,8.6 h0.7
  text "Keep pins ESD3 separated by soldermask dams" at 5.825,8.575 h0.55
  text "Vendor logo, date code,  / RoHS if appropriate (placed on bottom). / Possible place marked." at 27.75,2.775 h0.55
ASM BOT:
  drawing of 209 lines, arcs and shapes, not listed
  text "Assembly bottom" at 22.275,29.975 h1
ASM TOP:
  lines w0.1: 1.525,9.85 1.85,11.1 ; 2.075,21.25 2.7,16.85 ; 8.225,2.7 9.975,3.775 ; 22.875,27.675 22.875,30.75 34.475,30.75 34.475,28.025 ; 33.05,21.175 33.05,28.025 42.375,28.025 42.375,22.05 39.15,22.05 38.275,21.175 33.05,21.175
  lines w0.2: 0.099,6.879 cw(c2.5,3.68) 4.199,0.059 ; 0.099,24.481 ccw(c2.5,27.68) 4.199,31.301
  lines w0.3: 0,2 ccw(c2,2) 2,0 67,0 ccw(c67,2) 69,2 69,29.37 ccw(c67,29.37) 67,31.37 2,31.37 ccw(c2,29.37) 0,29.37 0,2
  text "Assembly top" at 41.275,29.95 h1.25
  text "U18" at 22.475,19.325 h0.4
  text "U1" at 31.225,19.25 h0.4
  text "A17" at 22.675,11.075 h0.4
  text "A2" at 30.5,10.925 h0.4
  text "ASSEMBLY NOTE: / J7 mechanical mechanical holes must be soldered for mechanical durability." at 6.05,9.075 h0.55 r90

## Dimensions
2.5,27.68 to 7.475,25.2 on Mechanical1
66.486,15.685 to 67,0 on Mechanical1
66.486,15.685 to 64.15,17.5 on Mechanical1
26.5,1.3 to 56.5,1.3 on Mechanical1
26.5,30.07 to 26.5,1.3 on Mechanical1
26.5,31.57 to 31.306,26.764 on Mechanical1
2.5,3.68 to 2.5,27.68 on Mechanical1

## Text inside footprints (layer, text, board x,y; h text height)
IC1: ASM TOP "Footprint revision: r5" at 39.309,20.859 h0.4; ASM TOP "1) paste/pad ratio ~60% / 2) 4 thermal pad vias  / without metal cap / 3) all other thermal pad  / vias with metal cap" at 40.434,9.684 h0.4; ASM TOP "Pad size = 0.35mm / Pad paste mask = 0.35mm / No AM2 pad" at 39.359,17.059 h0.4; Mechanical1 "0.2mm/0.5mm hole/ring vias under   / pad to be left open (no metal cap)" at 38.309,20.009 h0.35
J3: TopOverlay "1" at 24.725,28.6 h0.55 r90; TopOverlay "9" at 25.425,20.975 h0.55 r90; TopOverlay "2" at 32.9,27.025 h0.55 r90; TopOverlay "10" at 32.9,21.95 h0.55 r90
J7: ASM BOT "in" at 36.95,27.25 h0.55
J8: ASM BOT "in" at 41,27.1 h0.55
LED1: ASM TOP "A" at 61.225,15.4 h0.55; ASM TOP "C" at 63.125,15.4 h0.55
LED2: ASM TOP "C" at 64.4,28.8 h0.55; ASM TOP "A" at 66.275,28.825 h0.55
LED3: ASM TOP "C" at 64.425,1.975 h0.55; ASM TOP "A" at 66.2,1.95 h0.55
T1: Mechanical13 "Pri*" at 53.8,14.11 h0.2; Mechanical13 "Pri" at 56.6,14.11 h0.2; Mechanical13 "Sec*" at 53.8,19.91 h0.2; Mechanical13 "Sec" at 56.5,19.91 h0.2; Mechanical13 "NC" at 55.3,19.91 h0.2
T2: Mechanical13 "NC" at 58.55,5.725 h0.2 r270; Mechanical13 "Sec" at 58.55,4.525 h0.2 r270; Mechanical13 "Sec*" at 58.55,7.225 h0.2 r270; Mechanical13 "Pri" at 52.75,4.425 h0.2 r270; Mechanical13 "Pri*" at 52.75,7.225 h0.2 r270
T3: Mechanical13 "Pri*" at 46.825,28 h0.2 r270; Mechanical13 "Pri" at 46.825,25.2 h0.2 r270; Mechanical13 "Sec*" at 52.625,28 h0.2 r270; Mechanical13 "Sec" at 52.625,25.3 h0.2 r270; Mechanical13 "NC" at 52.625,26.5 h0.2 r270
T4: Mechanical13 "NC" at 59.1,23.25 h0.2 r270; Mechanical13 "Sec" at 59.1,22.05 h0.2 r270; Mechanical13 "Sec*" at 59.1,24.75 h0.2 r270; Mechanical13 "Pri" at 53.3,21.95 h0.2 r270; Mechanical13 "Pri*" at 53.3,24.75 h0.2 r270
XO1: ASM BOT "10" at 29.9,23.525 h0.39; ASM BOT "9" at 29.925,26.1 h0.39; ASM BOT "8" at 28.15,26.825 h0.39; ASM BOT "6" at 25.675,26.85 h0.39; ASM BOT "5" at 24.075,26.125 h0.39; ASM BOT "4" at 24.05,23.55 h0.39; ASM BOT "3" at 25.7,22.95 h0.39; ASM BOT "1" at 28.175,22.925 h0.39